# Altium PCB PCB1.PcbDoc
Units mm, origin at the board's own origin, x right, y up, seen from the top; angles counter-clockwise.
Board outline 67 x 97.84 mm, 4 copper layers (Top Layer, +5V, GND, Bottom Layer), stack 0.778 mm thick; 87 components, 66 nets, 324 pads, 26 vias.
Unrouted connection lines stored in the file: 44.
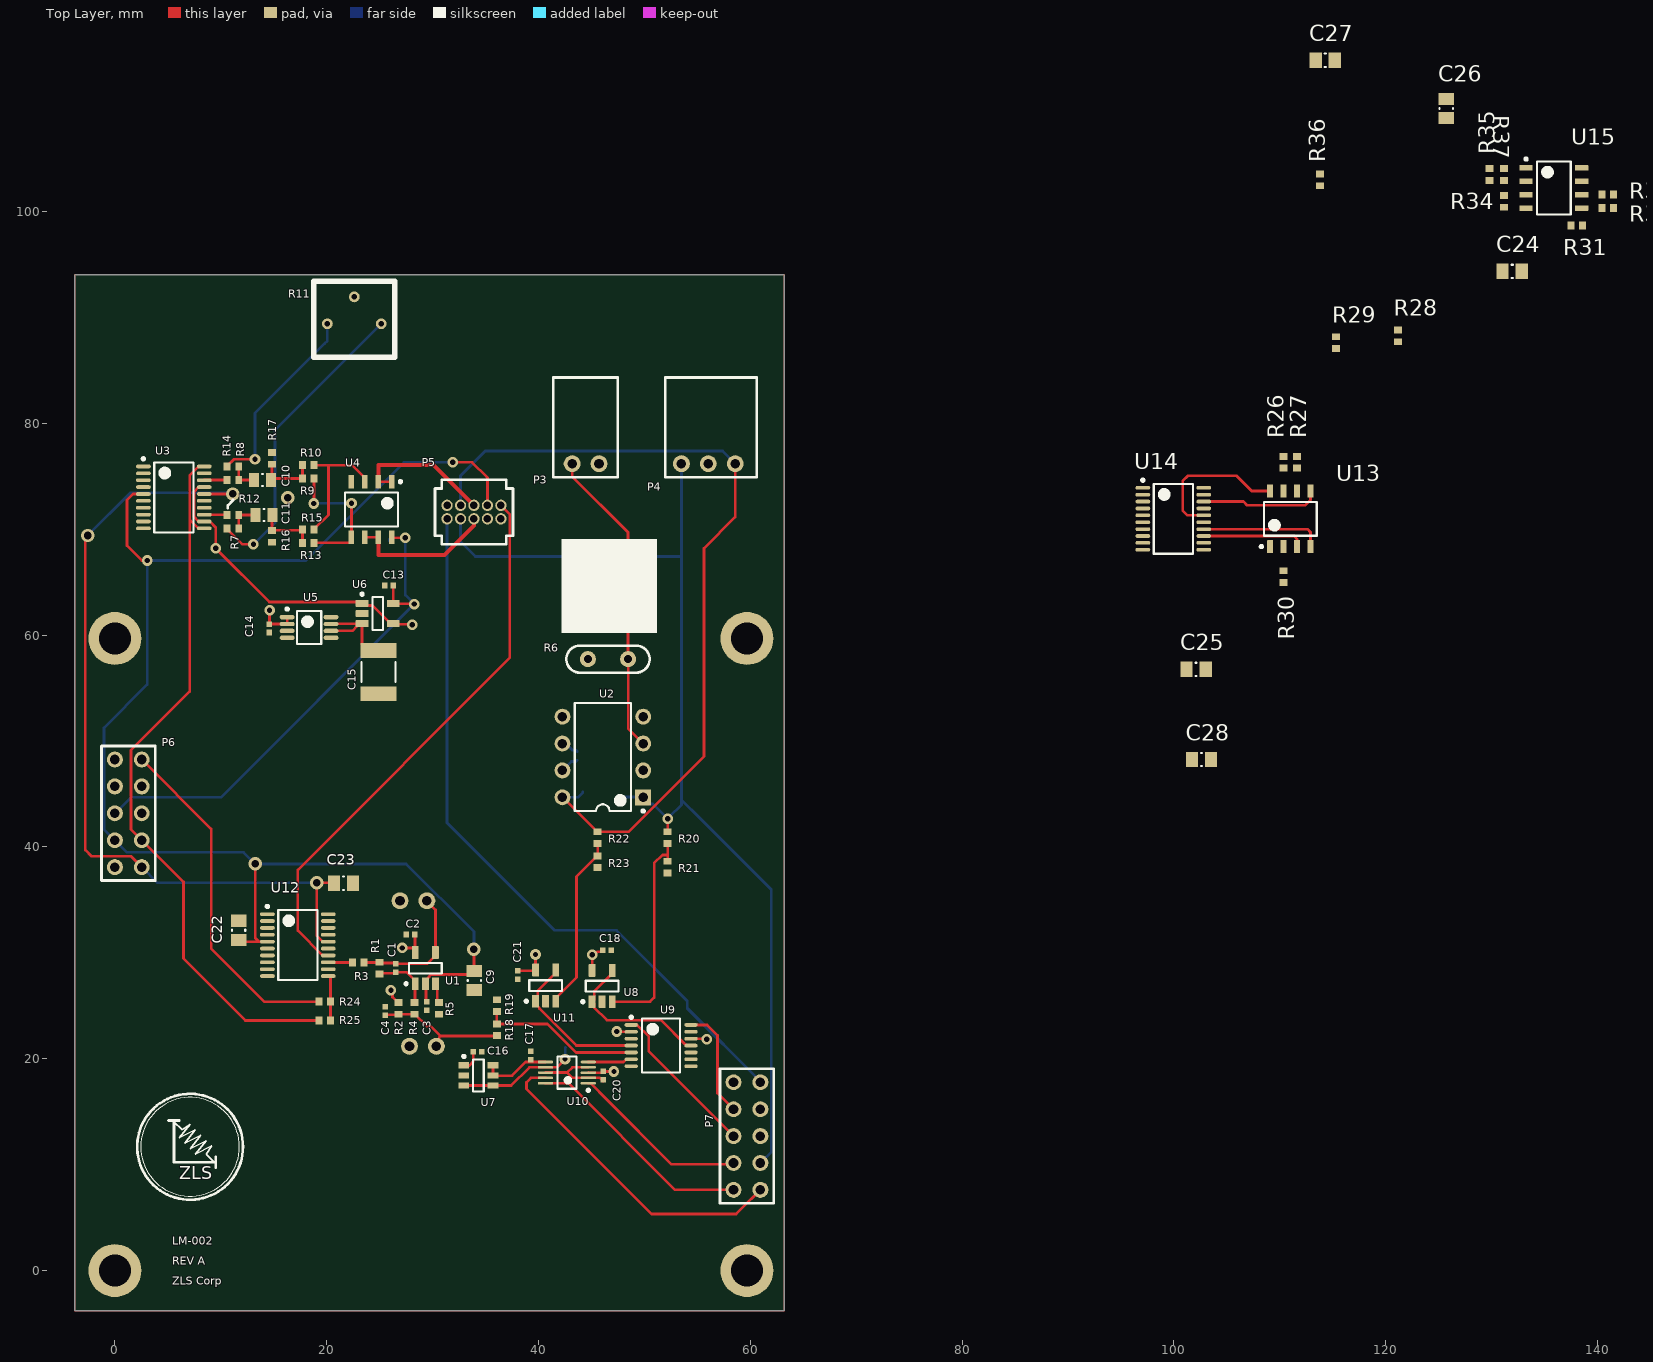
[diagram p0: Top Layer view]
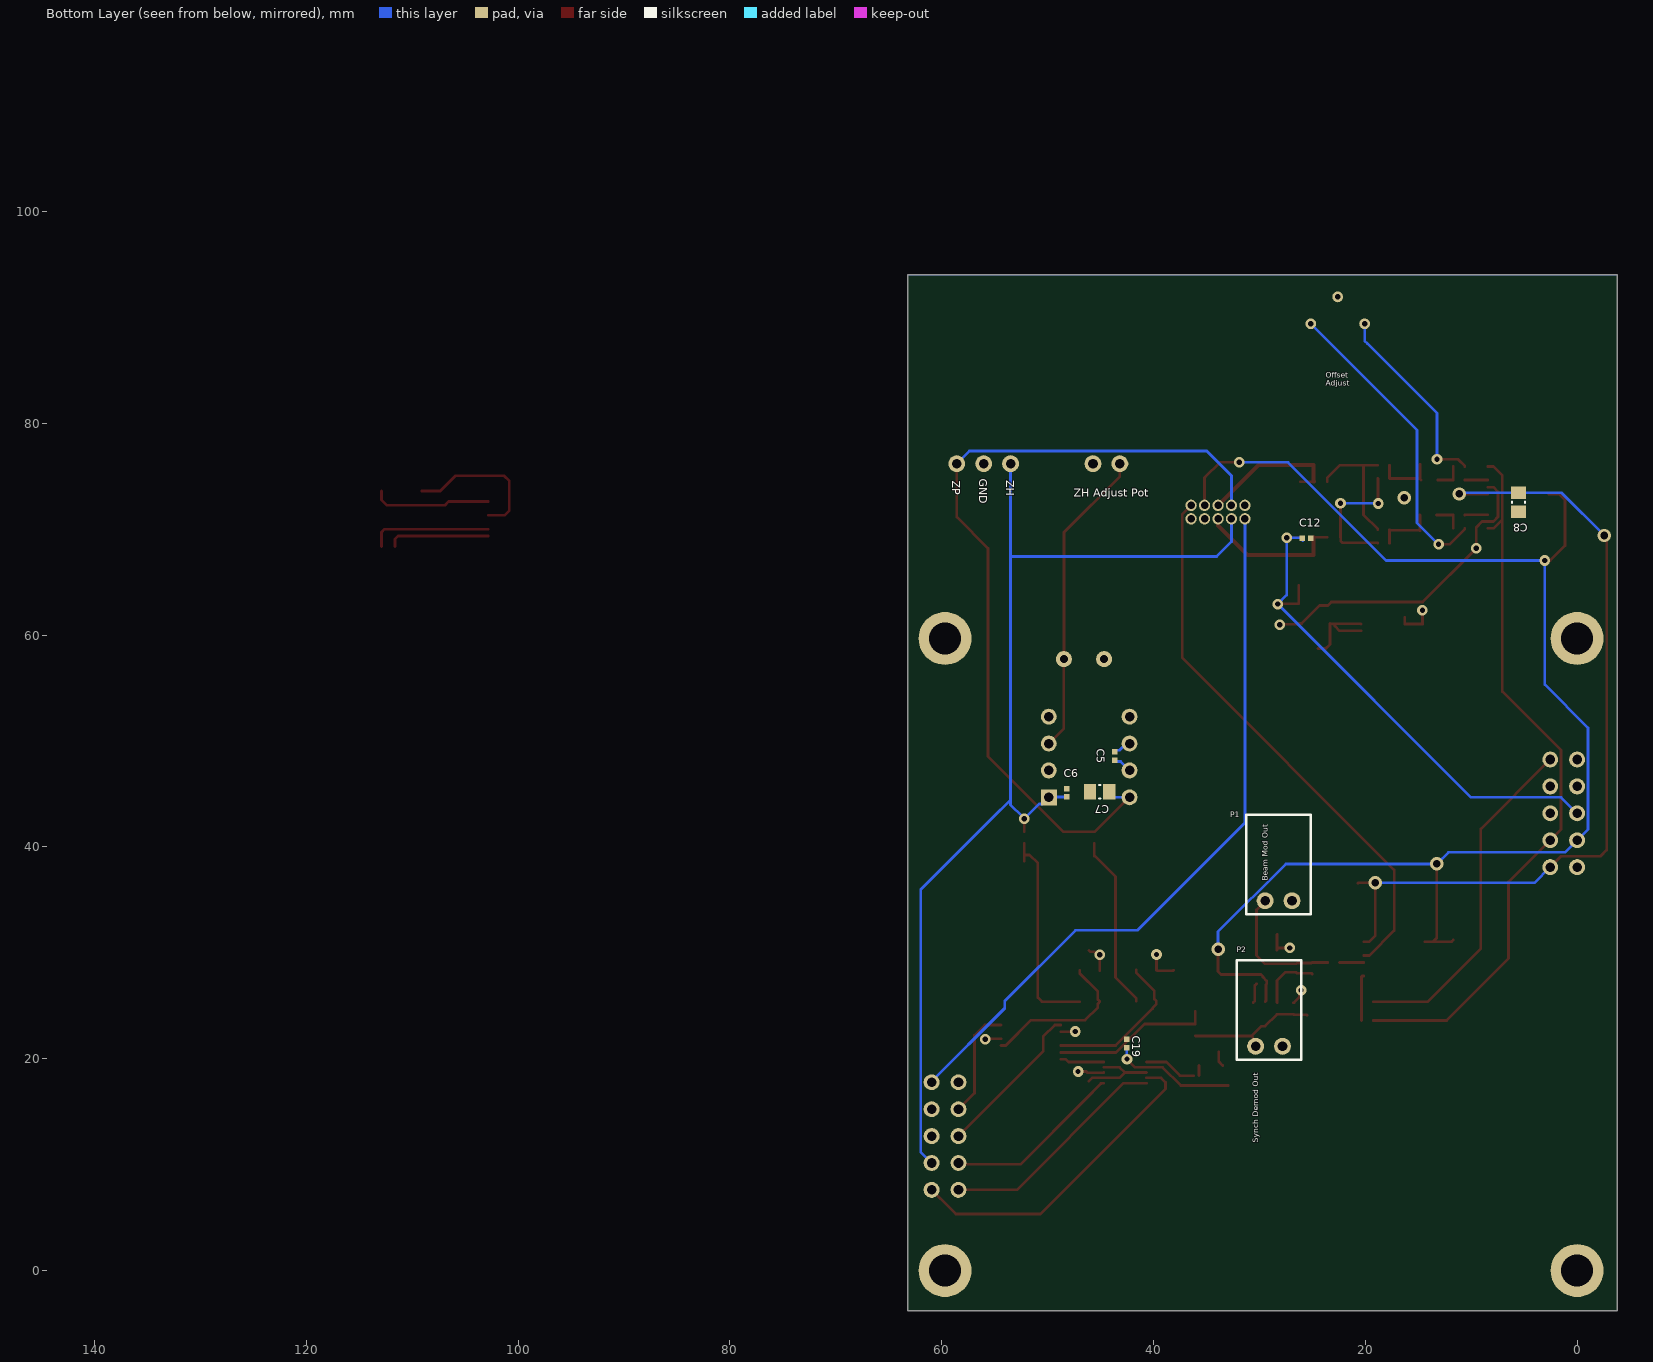
[diagram p1: Bottom Layer view, seen from below]
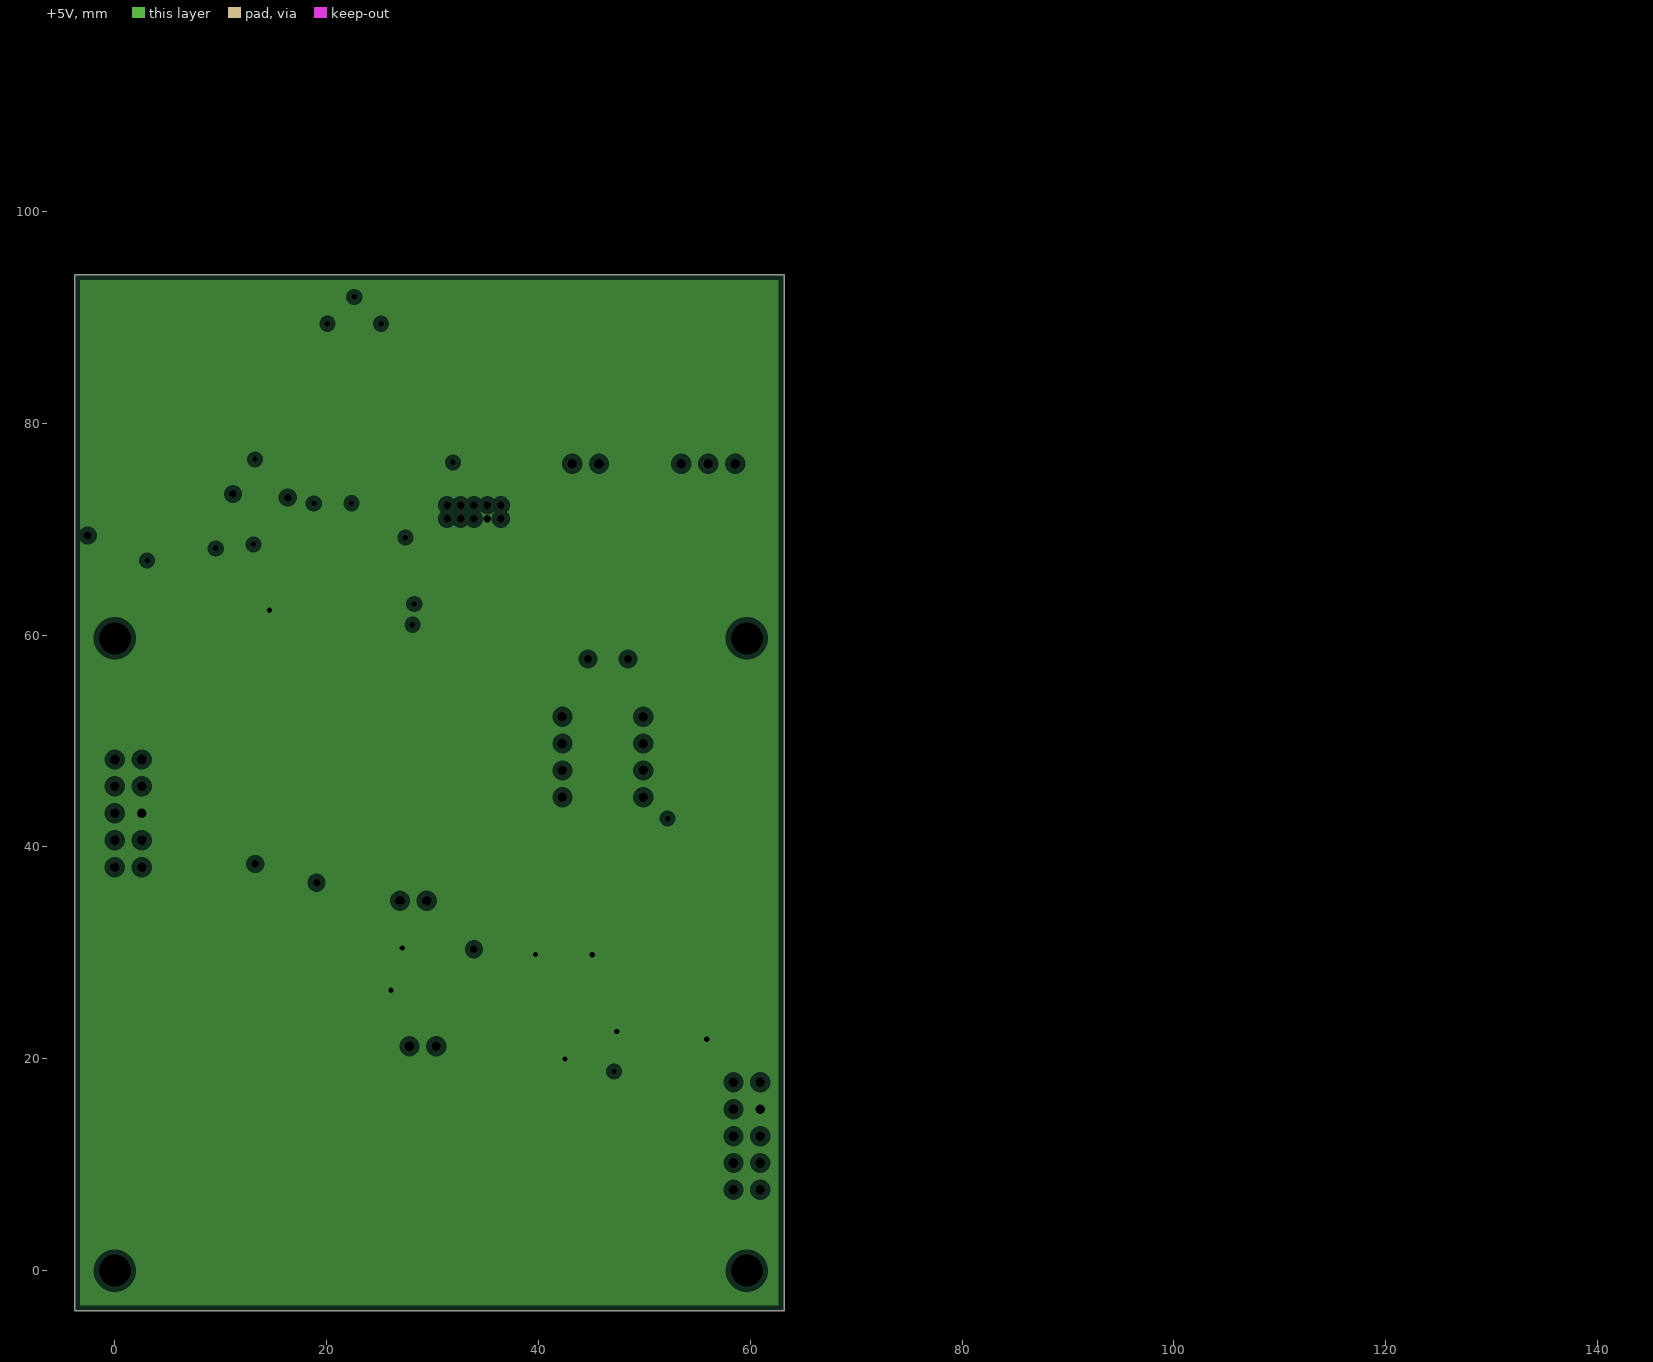
[diagram p2: +5V, clearances drawn from the general rule]
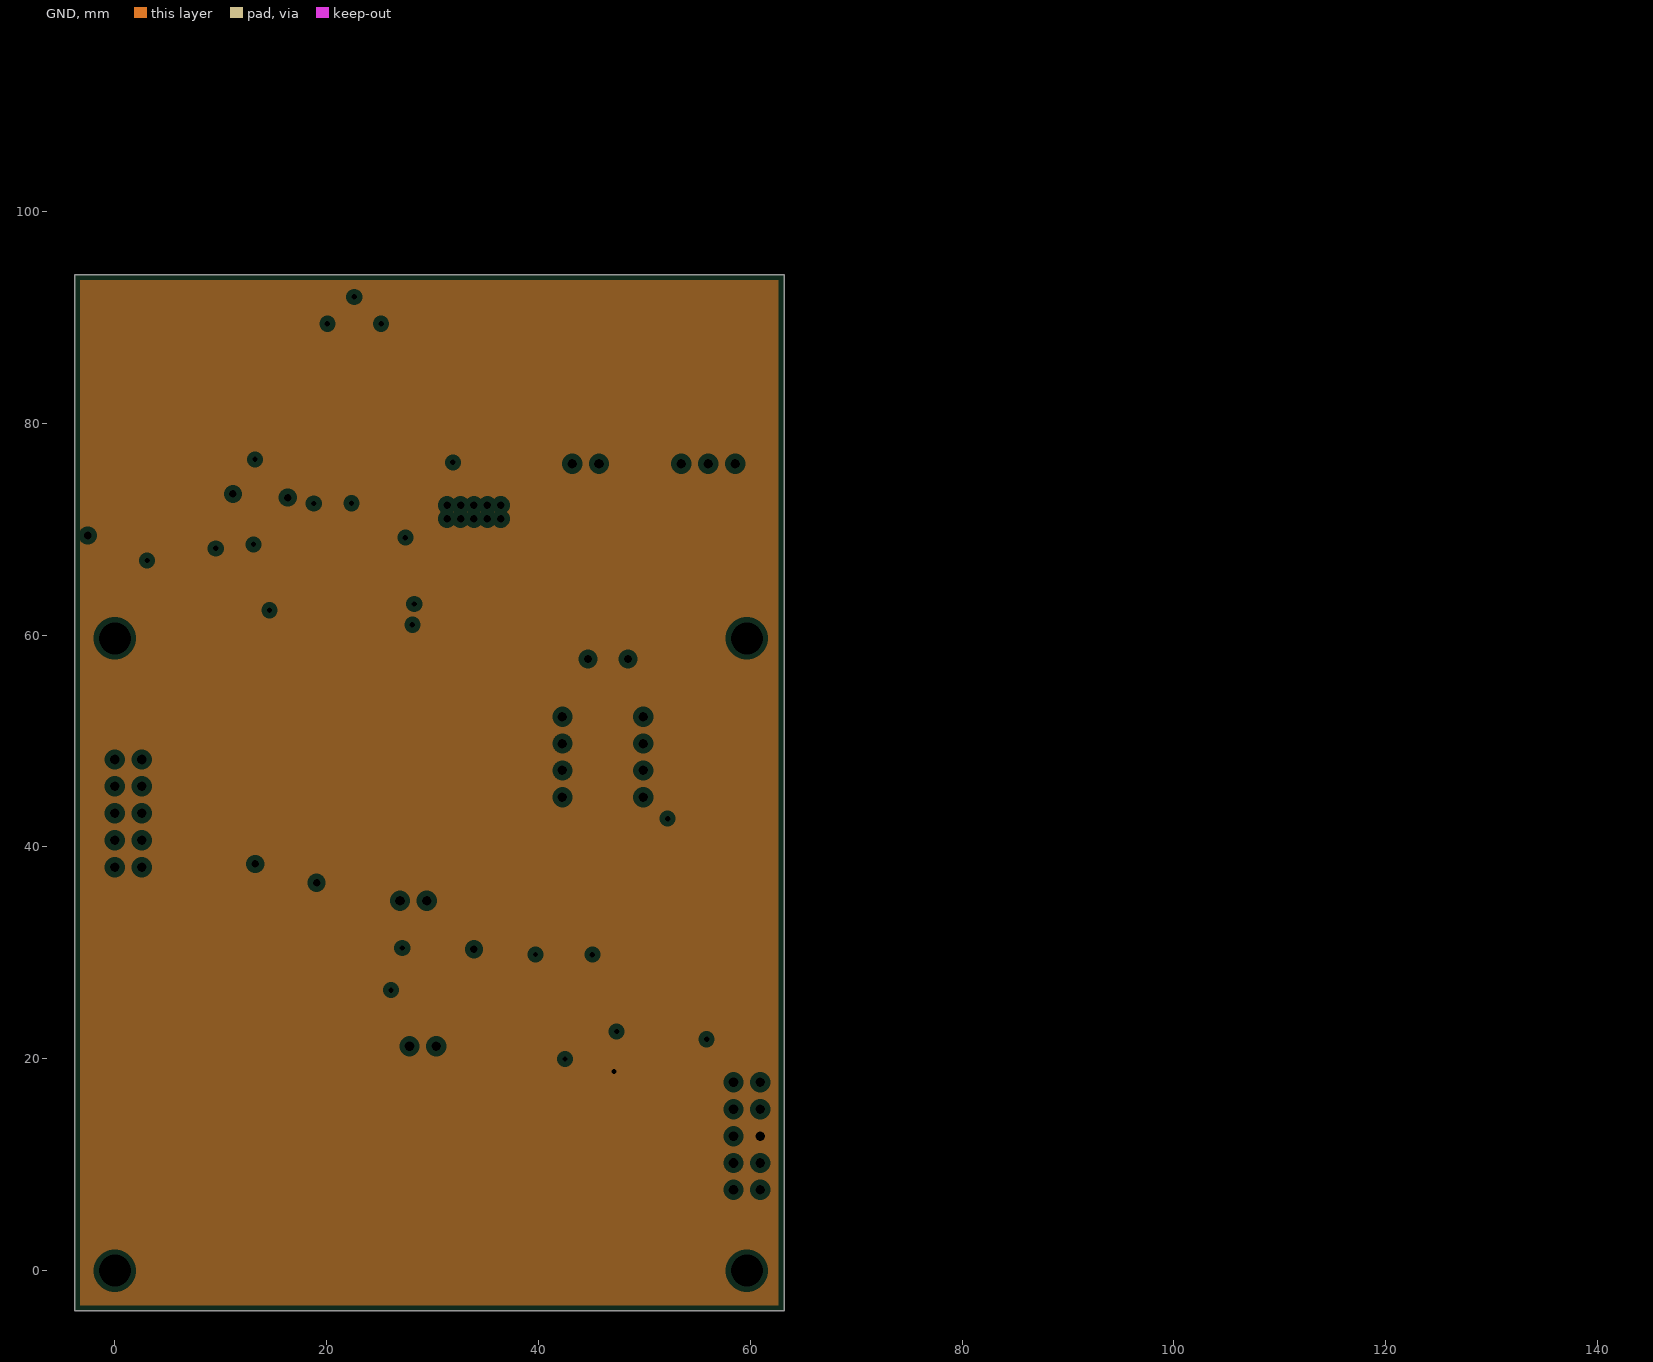
[diagram p3: GND, clearances drawn from the general rule]

## Layer stack, top to bottom
Top Solder: solder mask 0.0102, Solder Resist, Dk 3.5
Top Layer: signal copper 0.0356
Dielectric 1: core 0.254, FR-4, Dk 4.2
+5V: plane copper 0.036, net +5
Dielectric 4: prepreg 0.127, Dk 4.2
GND: plane copper 0.036, net +3.3
Dielectric 3: core 0.254, Dk 4.2
Bottom Layer: signal copper 0.0356
Bottom Solder: solder mask 0.0102, Solder Resist, Dk 3.5

## Board outline
-3.813,-3.813 63.187,-3.813 63.187,94.031 -3.813,94.031

## Design rules (kind name [scope] priority, off if disabled: settings)
Clearance [All] p1: gap=0.15 ignorepadtopadclearanceinfootprint=TRUE except(0.04: SMDPad-SMDPad; 0.1: SMDPad-THPad)
DiffPairsRouting DiffPair_DiffPairsRouting [InDifferentialPair ('PLATE')] p1: maxlimit=0.254 minlimit=0.254 mostfreqgap=0.254 toplayer_minwidth=0.381 toplayer_maxwidth=0.381 toplayer_prefwidth=0.381 bottomlayer_minwidth=0.381 bottomlayer_maxwidth=0.381 bottomlayer_prefwidth=0.381 maxuncoupledlength=12.7
DiffPairsRouting [All] p2: maxlimit=0.254 minlimit=0.254 mostfreqgap=0.254 toplayer_minwidth=0.381 toplayer_maxwidth=0.381 toplayer_prefwidth=0.381 bottomlayer_minwidth=0.381 bottomlayer_maxwidth=0.381 bottomlayer_prefwidth=0.381 maxuncoupledlength=12.7
HoleSize [All] p1: absolutevalues=TRUE maxlimit=10 minlimit=0.076 maxpercent=80.000 minpercent=20.000
HoleToHoleClearance [All] p1: gap=0.12 allowstackedmicrovias=TRUE
MatchedLengths DiffPair_MatchedLengths [InDifferentialPair ('PLATE')] p1: tolerance=2.54 checknetsindiffpair=FALSE checkdiffpairvsdiffpair=TRUE checkxsignals=TRUE checkothers=TRUE
MinimumSolderMaskSliver [All] p1: minsoldermaskwidth=0.025
PlaneClearance [All] p1: clearance=0.508
PlaneConnect [All] p1: planeconnectstyle=Relief reliefexpansion=0.508 reliefentries=4 reliefconductorwidth=0.254 reliefairgap=0.254
PolygonConnect [All] p1: connectstyle=Relief reliefconductorwidth=0.254 reliefentries=4 polygonreliefangle="90 Angle" airgapwidth=0.254
RoutingVias [All] p1: holewidth=0.711 width=1.27 viastyle="Through Hole" minholewidth=0.127 minwidth=0.9 maxholewidth=1.4 maxwidth=2.54
SilkToSilkClearance [All] p1: silktosilkclearance=0.12
SilkToSolderMaskClearance [IsPad] p1: minsilkscreentomaskgap=0.12 clearancetoexposedcopper=TRUE
SolderMaskExpansion [All] p1: expansion=0.102
Width [All] p1: maxlimit=0.254 minlimit=0.1 preferedwidth=0.254
22 further rules are at their usual default settings.

## Classes and differential pairs
component class Sheet4: C26 C27 C28 R31 R32 R33 R34 R35 R36 R37 U15
component class Sheet3: C24 C25 R26 R27 R28 R29 R30 U13 U14
component class Sheet2: C16 C17 C18 C19 C20 C21 R18 R19 R20 R21 R22 R23 U7 U8 U9 U10 U11
component class Sheet1: 19.685mil C1 C2 C3 C4 C5 C6 C7 C8 C9 C10 C11 C12 C13 C14 C15 C22 C23 P1 P2 P3 P4 P5 P6 P7 R1 R2 R3 R4 R5 R6 R7 R8 R9 R10 R11 R12 R13 R14 R15 R16 R17 R24 R25 U1 U2 U3 U4 U5 U6 U12
differential pair PLATE: +PLATE_P -PLATE_N

## Components (designator, comment, footprint, x,y, rotation, side; value= is the part's Value field where it differs from the comment)
C1 "" CAPC0402(1005)60_L 26.525,28.561 r270 top
C2 "0.1uF" CAPC0402(1005)60_L 27.922,31.736 r180 top
C3 "0.1uF" CAPC0402(1005)60_L 29.446,25.005 r270 top
C4 "" CAPC0402(1005)60_L 25.509,24.497 r270 top
C5 "0.1uF" CAPC0402(1005)60_L 43.663,48.602 r90 bottom
C6 "0.1uF" CAPC0402(1005)60_L 48.21,45.122 r270 bottom
C7 "Multilayer Ceramic Capacitors MLCC - SMD/SMT 0.01uF 50volts 10% X7R" CAPC0805(2012)145_N 45.085,45.212 r0 bottom
C8 "CAP CER 0.1UF 25V X7R 0805" CAPC0805(2012)145_N 5.538,72.554 r90 bottom
C9 "CAP CER 0.1UF 25V X7R 0805" CAPC0805(2012)145_N 33.941,27.393 r270 top
C10 "CAP CER 1UF 25V X7R 0805" CAPC0805(2012)155_L 13.945,74.662 r180 top
C11 "CAP CER 1UF 25V X7R 0805" CAPC0805(2012)155_L 14.072,71.36 r180 top
C12 "0.1uF" CAPC0402(1005)60_L 25.553,69.176 r0 bottom
C13 "0.1uF" CAPC0402(1005)60_L 25.883,64.694 r0 top
C14 "0.1uF" CAPC0402(1005)60_L 14.58,60.655 r90 top
C15 "CAP FILM 10UF 20% 16VDC 1812" CAPC1812(4532)250_N 24.892,56.515 r90 top value=10uF
C16 "0.1uF" CAPC0402(1005)60_L 34.242,20.642 r0 top
C17 "0.1uF" CAPC0402(1005)60_L 39.249,20.32 r270 top
C18 "0.1uF" CAPC0402(1005)60_L 46.488,30.226 r180 top
C19 "0.1uF" CAPC0402(1005)60_L 42.551,21.463 r90 bottom
C20 "0.1uF" CAPC0402(1005)60_L 46.107,18.415 r270 top
C21 "0.1uF" CAPC0402(1005)60_L 38.031,27.901 r90 top
C22 "CAP CER 0.1UF 25V X7R 0805" CAPC0805(2012)145_N 11.684,32.131 r90 top
C23 "CAP CER 0.1UF 25V X7R 0805" CAPC0805(2012)145_N 21.59,36.576 r180 top
C24 "CAP CER 0.1UF 25V X7R 0805" CAPC0805(2012)145_N 131.95,94.358 r0 top
C25 "CAP CER 0.1UF 25V X7R 0805" CAPC0805(2012)145_N 102.108,56.769 r0 top
C26 "CAP CER 0.1UF 25V X7R 0805" CAPC0805(2012)145_N 125.73,109.728 r270 top
C27 "CAP CER 0.1UF 25V X7R 0805" CAPC0805(2012)145_N 114.3,114.3 r0 top
C28 "CAP CER 0.1UF 25V X7R 0805" CAPC0805(2012)145_N 102.616,48.26 r0 top
P1 "SSW-102-02-G-S-RA" SSW-102-02-G-S-RA 26.924,34.925 r0 bottom
P2 "SSW-102-02-G-S-RA" SSW-102-02-G-S-RA 27.819,21.179 r0 bottom
P3 "SSW-102-02-G-S-RA" SSW-102-02-G-S-RA 45.72,76.2 r180 top
P4 "SSW-103-02-G-S-RA" SSW-103-02-G-S-RA 53.5,76.2 r0 top
P5 "FTSH-105-01-F-DV-K" FTSH-105-01-XXX-D-K 33.909,71.628 r180 top
P6 "TLW-105-05-G-D" TLW-105-05-G-D 0,48.26 r270 top
P7 "TLW-105-05-G-D" TLW-105-05-G-D 58.42,17.78 r270 top
R1 "300K" RESC0402(1005)_M 25.001,28.561 r270 top
R2 "100k" RESC0402(1005)_M 26.779,24.751 r90 top
R3 "18K2 1% 0402(1005)" RESC0402(1005)_M 22.987,29.083 r0 top
R4 "511k" RESC0402(1005)_M 28.303,24.751 r270 top
R5 "33K" RESC0402(1005)_M 30.589,24.751 r90 top
R6 "TBD" VH102K 48.469,57.738 r180 top
R7 "3.9k" RESC0402(1005)_M 11.151,74.662 r180 top
R8 "7.5k" RESC0402(1005)_M 11.151,75.932 r0 top
R9 "0" RESC0402(1005)_M 18.263,74.789 r180 top
R10 "DNP" RESC0402(1005)_M 18.263,76.059 r180 top
R11 "TRIMMER 5K OHM 0.25W PC PIN" "TRIMMER 2.54" 20.066,89.408 r0 top
R12 "7.5k" RESC0402(1005)_M 11.151,70.09 r180 top
R13 "DNP" RESC0402(1005)_M 18.263,68.693 r180 top
R14 "3.9k" RESC0402(1005)_M 11.151,71.36 r0 top
R15 "0" RESC0402(1005)_M 18.263,69.963 r180 top
R16 "1M" RESC0402(1005)_M 14.834,69.328 r90 top
R17 "1M" RESC0402(1005)_M 14.834,76.694 r270 top
R18 "10k" RESC0402(1005)_M 36.074,22.733 r270 top
R19 "10k" RESC0402(1005)_M 36.074,25.019 r270 top
R20 "100k" RESC0402(1005)_M 52.197,40.894 r90 top
R21 "10k" RESC0402(1005)_M 52.197,38.1 r90 top
R22 "100k" RESC0402(1005)_M 45.593,40.894 r90 top
R23 "10k" RESC0402(1005)_M 45.593,38.608 r90 top
R24 "OPEN" RESC0402(1005)_M 19.812,25.4 r0 top
R25 "0" RESC0402(1005)_M 19.812,23.622 r0 top
R26 "100k" RESC0402(1005)_M 110.363,76.327 r270 top
R27 "100k" RESC0402(1005)_M 111.633,76.327 r270 top
R28 "47k" RESC0402(1005)_M 121.158,88.265 r90 top
R29 "100k" RESC0402(1005)_M 115.316,87.63 r90 top
R30 "100k" RESC0402(1005)_M 110.363,65.532 r90 top
R31 "2.2M" RESC0402(1005)_M 138.049,98.679 r180 top
R32 "100" RESC0402(1005)_M 140.97,100.33 r0 top
R33 "100" RESC0402(1005)_M 140.97,101.6 r0 top
R34 "475K" RESC0402(1005)_M 131.191,100.965 r270 top
R35 "10k" RESC0402(1005)_M 129.794,103.505 r90 top
R36 "47.5K" RESC0402(1005)_M 113.792,102.997 r90 top
R37 "301K" RESC0402(1005)_M 131.191,103.505 r270 top
U1 "OPA188AIDBVR" DBV0005A_M 29.319,28.561 r90 top
U2 "AD584KNZ" ADI-N-8 46.076,48.5 r180 top
U3 "MAX333CWP+" TSOP65P640X90-20N 5.563,73.011 r0 top
U4 "OPA2188AIDR" D0008A_L 24.232,71.868 r270 top
U5 "LTC6655BHMS8-5#PBF" TSOP65P490X110-8N 18.339,60.731 r0 top
U6 "OPA188AIDBVR" DBV0005A_M 24.816,62.052 r0 top
U7 "MAX6070AAUT41+T" SOT95P280X445-6N 34.331,18.422 r0 top
U8 "OPA188AIDBVR" DBV0005A_M 46.017,26.87 r90 top
U9 "ADG1204YRUZ-REEL7" ADI-RU-14_L 51.581,21.247 r0 top
U10 "MAX11100EUB+T" U10+2_L 42.684,18.695 r180 top
U11 "OPA188AIDBVR" DBV0005A_M 40.678,26.91 r90 top
U12 "MAX333CWP+" TSOP65P640X90-20N 17.272,30.734 r0 top
U13 "OPA2188AIDR" D0008A_L 110.998,70.993 r90 top
U14 "MAX333CWP+" TSOP65P640X90-20N 99.949,70.993 r0 top
U15 "OPA2188AIDR" D0008A_L 135.887,102.232 r0 top

## Footprints (in the part's own frame and the unit in brackets; to place one, negate y for a bottom-side part, rotate by r counter-clockwise, add the part's x,y. Pads: shape width x height; smd on the part's side, far side on the other; paste and mask are expansions set on the pad)
ADI-N-8 [mm] "DIP, 8-Leads, Body 9.59x6.6mm, Pitch 2.54mm"
  rect 1.5x1.5 hole 0.9: 1(-3.81,3.81)
  round 1.5 hole 0.9: 2(-3.81,1.27) 3(-3.81,-1.27) 4(-3.81,-3.81) 5(3.81,-3.81) 6(3.81,-1.27) 7(3.81,1.27) 8(3.81,3.81)
  silkscreen extent -3.94,-5.1 2.65,5.23, body extent -3.95,-5.07 3.95,5.07, height 5.33
ADI-RU-14_L [mm] "SOP, 14-Leads, Body 5x4.4mm, Pitch 0.65mm, IPC High Density"
  oval 1.25x0.35 smd: 1(-2.825,1.95) 2(-2.825,1.3) 3(-2.825,0.65) 4(-2.825,0) 5(-2.825,-0.65) 6(-2.825,-1.3) 7(-2.825,-1.95) 8(2.825,-1.95) 9(2.825,-1.3) 10(2.825,-0.65) 11(2.825,0) 12(2.825,0.65) 13(2.825,1.3) 14(2.825,1.95)
  silkscreen extent -2.95,-2.55 1.8,2.8, body extent -2.25,-2.55 2.25,2.55, height 1.2
CAPC0402(1005)60_L [mm] "Chip Capacitor, Body 1.0x0.5mm, Height 0.6mm, IPC High Density"
  rect 0.52x0.52 smd: 1(-0.4,0) 2(0.4,0)
  body extent -0.55,-0.3 0.55,0.3, height 0.6
CAPC0805(2012)145_N [mm] "Chip Capacitor, Body 2.0x1.2mm, Height 1.45mm, IPC Medium Density"
  rect 1.15x1.45 smd: 1(-0.9,0) 2(0.9,0)
  silkscreen extent -0.05,-0.62 0.05,0.62, body extent -1.1,-0.72 1.1,0.73, height 1.45
CAPC0805(2012)155_L [mm] "Chip Capacitor, Body 2.0x1.2mm, Height 1.55mm, IPC High Density"
  rect 0.95x1.35 smd: 1(-0.8,0) 2(0.8,0)
  silkscreen extent -0.05,-0.57 0.05,0.57, body extent -1.1,-0.72 1.1,0.72, height 1.55
CAPC1812(4532)250_N [mm] "Chip Capacitor, Body 4.5x3.2mm, Height 2.5mm, IPC Medium Density"
  rect 1.4x3.4 smd: 1(-2.05,0) 2(2.05,0)
  silkscreen extent -0.95,-1.6 0.95,1.6, body extent -2.4,-1.7 2.4,1.7, height 2.5
D0008A_L [mm] "SOIC, 8-Leads, Body 5x4mm, Pitch 1.27mm, IPC High Density"
  rrect18% 1.25x0.55 smd: 1(-2.625,1.905) 2(-2.625,0.635) 3(-2.625,-0.635) 4(-2.625,-1.905) 5(2.625,-1.905) 6(2.625,-0.635) 7(2.625,0.635) 8(2.625,1.905)
  silkscreen extent -2.75,-2.5 1.6,2.86, body extent -3,-2.45 3,2.45, height 1.63
DBV0005A_M [mm] "SOT23, 5-Leads, Body 3.05x1.75mm, Pitch 0.95mm, IPC Low Density"
  rrect15% 1.2x0.65 smd: 1(-1.475,0.95) 2(-1.475,0) 3(-1.475,-0.95) 4(1.475,-0.95) 5(1.475,0.95)
  silkscreen extent -1.6,-1.55 0.5,1.95, body extent -1.42,-1.46 1.42,1.46, height 1.08
FTSH-105-01-XXX-D-K [mil]
  round 42 hole 28 mask+3: 1(-100,-25) 2(-100,25) 3(-50,-25) 4(-50,25) 5(0,-25) 6(0,25) 7(50,-25) 8(50,25) 9(100,-25) 10(100,25)
  silkscreen extent -145,-120 145,120
RESC0402(1005)_M [mm] "Chip Resistor, Body 1.0x0.5mm, IPC Low Density"
  rect 0.65x0.75 smd: 1(-0.55,0) 2(0.55,0)
  body extent -0.52,-0.28 0.53,0.28, height 0.4
SOT95P280X445-6N [mm] "SOT23, 6-Leads, Body 2.90x2.80mm, Pitch 0.95mm, IPC Medium Density"
  rect 1x0.6 smd: 1(-1.375,0.95) 2(-1.375,0) 3(-1.375,-0.95) 4(1.375,-0.95) 5(1.375,0) 6(1.375,0.95)
  silkscreen extent -1.5,-1.5 0.5,1.92, body extent -1.5,-1.5 1.5,1.5, height 4.45
SSW-102-02-G-S-RA [mm]
  round 1.6 hole 0.91: 1(0,0) 2(2.54,0)
  silkscreen extent -1.78,-8.13 4.32,1.27, body extent -1.52,-8.06 4.06,0.44, height 3.21
SSW-103-02-G-S-RA [mm]
  round 1.6 hole 0.91: 1(0,0) 2(2.54,0) 3(5.08,0)
  silkscreen extent -1.52,-1.27 7.11,8.13, body extent -1.27,-0.44 6.86,8.06, height 1.73
TLW-105-05-G-D [mm]
  round 1.5 hole 0.91: 1(0,0) 2(0,2.54) 3(2.54,0) 4(2.54,2.54) 5(5.08,0) 6(5.08,2.54) 7(7.62,0) 8(7.62,2.54) 9(10.16,0) 10(10.16,2.54)
  silkscreen extent -1.27,-1.27 11.43,3.81, body extent -1.27,-1.31 11.43,3.72, height 6.35
"TRIMMER 2.54" [mil]
  round 40 hole 20: 1(0,0) 2(100,100) 3(200,0)
  silkscreen extent -50,-125 250,158, body extent -60,-126 260,200, height 175
TSOP65P490X110-8N [mm] "TSOP, 8-Leads, Body 3.00x3.00mm, Pitch 0.65mm, IPC Medium Density"
  oval 1.4x0.42 smd: 1(-2.075,0.975) 2(-2.075,0.325) 3(-2.075,-0.325) 4(-2.075,-0.975) 5(2.075,-0.975) 6(2.075,-0.325) 7(2.075,0.325) 8(2.075,0.975)
  silkscreen extent -2.2,-1.55 1.15,1.86, body extent -2.46,-1.55 2.46,1.55, height 1.1
TSOP65P640X90-20N [mm] "TSOP, 20-Leads, Body 6.50x4.40mm, Pitch 0.65mm, IPC Medium Density"
  oval 1.4x0.35 smd: 1(-2.875,2.925) 2(-2.875,2.275) 3(-2.875,1.625) 4(-2.875,0.975) 5(-2.875,0.325) 6(-2.875,-0.325) 7(-2.875,-0.975) 8(-2.875,-1.625) 9(-2.875,-2.275) 10(-2.875,-2.925) 11(2.875,-2.925) 12(2.875,-2.275) 13(2.875,-1.625) 14(2.875,-0.975) 15(2.875,-0.325) 16(2.875,0.325) 17(2.875,0.975) 18(2.875,1.625) 19(2.875,2.275) 20(2.875,2.925)
  silkscreen extent -3,-3.3 1.85,3.77, body extent -2.25,-3.3 2.25,3.3, height 0.9
U10+2_L [mm] "TSSOP, 10-Leads, Body 3x3mm, Pitch 0.5mm, IPC High Density"
  oval 1.45x0.25 smd: 1(-2.025,1) 2(-2.025,0.5) 3(-2.025,0) 4(-2.025,-0.5) 5(-2.025,-1) 6(2.025,-1) 7(2.025,-0.5) 8(2.025,0) 9(2.025,0.5) 10(2.025,1)
  silkscreen extent -2.15,-1.53 0.9,1.8, body extent -1.55,-1.55 1.55,1.55, height 1.1
VH102K [mil] "Hermetically Sealed High Precision Resistor"
  round 60 hole 30: 1(0,0) 2(149.61,0)
  silkscreen extent -80,-50 230,50

## Part data
C1: library part CMP-1034-01343-1, Capacitance=470nF, Case/Package=0402, Case Code (Metric)=1005, Dielectric=X5R, Dielectric Material=Ceramic, Manufacturer=TDK, Manufacturer Part Number=C1005X5R1E474M050BB, Max Operating Temperature=85°C, Min Operating Temperature=-55°C, Package Quantity=10000, Supplier Part Number 1=810-C1005X5R1E474M, Tolerance=20%, Voltage Rating=25V, Case Code (Imperial)=0402, ComponentLink1Description=https://datasheet.ciiva.com/26870/getdatasheetpartid-753870-26870164.pdf, ComponentLink1URL=https://datasheet.ciiva.com/26870/getdatasheetpartid-753870-26870164.pdf, ComponentLink2Description=https://datasheet.ciiva.com/24219/mlcc-commercial-general-en-24219290.pdf, ComponentLink2URL=https://datasheet.ciiva.com/24219/mlcc-commercial-general-en-24219290.pdf, Composition=Ceramic, Depth=0.5mm, Height=0.5mm, Lead Free="Lead Free", Length=1mm, Mount="Surface Mount", Packaging="Tape and Reel", Pricing 1="1=0.15, 10=0.101, 50=0.101, 100=0.04, 1000=0.028, 10000=0.023 (USD)", Radiation Hardening=No, REACH SVHC="No SVHC", Stock 1=40105, Supplier 1=Mouser, Termination=SMD/SMT, Thickness=500um, Voltage Rating (DC)=25V, Weight=2.3E-05oz, Width=0.02inch
C2 C3 C5 C6 C12 C13 C14 C16 C17 C18 C19 C20 C21: library part CMP-1034-00252-1, "CAP CER 0.1UF 10V X7R 0402", Manufacturer="Murata Electronics North America", Manufacturer Part Number=GRM155R71A104KA01D, Operating Temperature="-55°C ~ 125°C", Package / Case="0402 (1005 Metric)", Ratings=-, Supplier Part Number 1=490-6321-1-ND, Temperature Coefficient=X7R, Tolerance=±10%, Voltage - Rated=10V, Applications="General Purpose", Category=Capacitors, ComponentLink1Description=http://www.murata.com/~/media/webrenewal/support/library/catalog/products/capacitor/mlcc/c02e.ashx?la=en-us, ComponentLink1URL=http://www.murata.com/~/media/webrenewal/support/library/catalog/products/capacitor/mlcc/c02e.ashx?la=en-us, Features=-, Height - Seated (Max)=-, Lead Spacing=-, Mounting Type="Surface Mount, MLCC", Packaging="Cut Tape (CT)", Part Status=Active, Pricing 1="1=0.1, 10=0.014, 100=0.0063, 500=0.00446, 1000=0.00351, 2500=0.00319, 5000=0.00293 (USD)", RoHS="RoHS Compliant", Size / Dimension="0.039\" L x 0.020\" W (1.00mm x 0.50mm)", Stock 1=2920395, Supplier 1=Digi-Key, Thickness (Max)="0.022\" (0.55mm)"
C4: library part CMP-1034-01343-1, Capacitance=22, Capacitance Tolerance=5%, Ceramic Capacitor Case="0402 [1005 Metric]", Dielectric Characteristic="C0G / NP0", Manufacturer=AVX, Manufacturer Part Number=04025A220JAT2A, Supplier Part Number 1=96M1143, Voltage Rating=50, ComponentLink1Description=http://www.farnell.com/datasheets/2068140.pdf, ComponentLink1URL=http://www.farnell.com/datasheets/2068140.pdf, Packaging="Cut Tape", Pricing 1="1=0.003, 25=0.003, 100=0.003, 250=0.003, 500=0.003, 1000=0.003, 2500=0.003 (USD)", Product Range=-, RoHS=YES, Stock 1=239391, Supplier 1=Newark
C7: library part CMP-1036-04795-1, Capacitance=10nF, Case/Package=0805, Case Code (Metric)=2012, Dielectric=X7R, Dielectric Material=Ceramic, Manufacturer=Kemet, Manufacturer Part Number=C0805C103K5RACAUTO, Max Operating Temperature=125°C, Min Operating Temperature=-55°C, Package Quantity=1, Supplier Part Number 1=399-6924-1-ND, Tolerance=10%, Voltage Rating=50V, Case Code (Imperial)=0805, ComponentLink1Description=https://datasheet.ciiva.com/22700/1693454-22700519.pdf, ComponentLink1URL=https://datasheet.ciiva.com/22700/1693454-22700519.pdf, ComponentLink2Description=https://datasheet.ciiva.com/7842/1693454-7842175.pdf, ComponentLink2URL=https://datasheet.ciiva.com/7842/1693454-7842175.pdf, Contact Plating=Tin, Depth=1.25mm, Height=0.78mm, Length=2mm, Mount="Surface Mount", Packaging="Tape and Reel", Pricing 1="1=0.12, 10=0.087, 100=0.041, 500=0.0287, 1000=0.0238 (USD)", Radiation Hardening=No, REACH SVHC="No SVHC", Stock 1=63236, Supplier 1=Digi-Key, Termination=SMD/SMT, Thickness=0.035inch, Voltage Rating (DC)=50V, Width=0.049inch
C8 C9 C22 C23 C24 C25 C26 C27 C28: library part CMP-1036-04795-1, Capacitance=0.1µF, Manufacturer="Murata Electronics North America", Manufacturer Part Number=GRM21BR71E104KA01L, Operating Temperature="-55°C ~ 125°C", Package / Case="0805 (2012 Metric)", Ratings=-, Supplier Part Number 1=490-1673-6-ND, Temperature Coefficient=X7R, Tolerance=±10%, Voltage - Rated=25V, Applications="General Purpose", Category=Capacitors, ComponentLink1Description=http://www.murata.com/~/media/webrenewal/support/library/catalog/products/capacitor/mlcc/c02e.ashx, ComponentLink1URL=http://www.murata.com/~/media/webrenewal/support/library/catalog/products/capacitor/mlcc/c02e.ashx, Features=-, Height - Seated (Max)=-, Lead Spacing=-, Lead Style=-, Mounting Type="Surface Mount, MLCC", Packaging=Digi-Reel®, Part Status=Active, Pricing 1="1=0.2, 10=0.145, 100=0.0683, 500=0.04788, 1000=0.03964 (USD)", RoHS="RoHS Compliant", Size / Dimension="0.079\" L x 0.049\" W (2.00mm x 1.25mm)", Stock 1=891652, Supplier 1=Digi-Key, Thickness (Max)="0.053\" (1.35mm)"
C10 C11: library part CMP-1036-04882-1, Capacitance=1µF, Manufacturer="Murata Electronics North America", Manufacturer Part Number=GRM21BR71E105KA99L, Operating Temperature="-55°C ~ 125°C", Package / Case="0805 (2012 Metric)", Ratings=-, Supplier Part Number 1=490-6484-6-ND, Temperature Coefficient=X7R, Tolerance=±10%, Voltage - Rated=25V, Applications="General Purpose", Category=Capacitors, ComponentLink1Description=http://www.murata.com/~/media/webrenewal/support/library/catalog/products/capacitor/mlcc/c02e.ashx, ComponentLink1URL=http://www.murata.com/~/media/webrenewal/support/library/catalog/products/capacitor/mlcc/c02e.ashx, Features=-, Height - Seated (Max)=-, Lead Spacing=-, Lead Style=-, Mounting Type="Surface Mount, MLCC", Packaging=Digi-Reel®, Part Status=Active, Pricing 1="1=0.14, 10=0.099, 100=0.0468, 500=0.0328, 1000=0.02715 (USD)", RoHS="RoHS Compliant", Size / Dimension="0.079\" L x 0.049\" W (2.00mm x 1.25mm)", Stock 1=295074, Supplier 1=Digi-Key, Thickness (Max)="0.053\" (1.35mm)"
C15: library part CMP-1040-01653-1, Case-EIA=1812, Case-Metric=4532, Dielectric Material="Acrylic, Metallized", Manufacturer=Rubycon, Manufacturer Part Number=16ST106MC44532, Operating Temperature="-55°C ~ 125°C", Package / Case="1812 (4532 Metric)", Rated Voltage="16 V", Supplier Part Number 1=1189-1792-1-ND, Tolerance=±10%, Voltage Rating - AC=-, Voltage Rating - DC=16V, Applications="DC Link, DC Filtering", Category=Capacitors, ComponentLink1Description=http://www.rubycon.co.jp/en/catalog/e_pdfs/pmlcap/e_ST.pdf, ComponentLink1URL=http://www.rubycon.co.jp/en/catalog/e_pdfs/pmlcap/e_ST.pdf, Features=-, Height - Seated (Max)="0.102\" (2.60mm)", Lead Spacing=-, Max Thickness="2.5 mm", Mounting Type="Surface Mount", Packaging="Cut Tape (CT)", Part Status=Active, Pricing 1="1=7.05, 10=6.263, 100=5.0105 (USD)", RoHS="RoHS Compliant", Size / Dimension="0.177\" L x 0.126\" W (4.50mm x 3.20mm)", Stock 1=1994, Supplier 1=Digi-Key, Technology=SMT
P1 P2 P3: Supplier Part Number 1=SAM1225-02-ND, Supplier 1=Digi-Key
P5: library part FTSH-105-01-XXX-D-K, "TERMINAL STRIP, .050\"(1.27mm) PITCH, 10 PINS, KEYING OPTION.", Manufacturer=SAMTEC, CREATED="September 26, 2016 - Wendy Xin", PCB DECAL=FTSH-105-01-F-DV-K
P6 P7: Current Rating="5.2A per Contact", Insulation Color=Black, Manufacturer="Samtec Inc.", Manufacturer Part Number=MTLW-105-05-G-D-170, Material Flammability Rating="UL94 V-0", Operating Temperature="-55°C ~ 125°C", Supplier Part Number 1=MTLW-105-05-G-D-170-ND, Voltage Rating=-, Applications=-, Category="Connectors, Interconnects", ComponentLink1Description=http://suddendocs.samtec.com/prints/mtlw-1xx-xx-xx-x-xxx-xx-xx-mkt1.pdf, ComponentLink1URL=http://suddendocs.samtec.com/prints/mtlw-1xx-xx-xx-x-xxx-xx-xx-mkt1.pdf, Connector Type=Header, Contact Finish - Mating=Gold, Contact Finish - Post=Gold, Contact Finish Thickness - Mating="10µin (0.25µm)", Contact Finish Thickness - Post="3µin (0.08µm)", Contact Length - Mating="0.170\" (4.32mm)", Contact Length - Post="0.105\" (2.67mm)", Contact Material="Phosphor Bronze", Contact Shape=Square, Contact Type="Male Pin", Fastening Type=Push-Pull, Features=-, Ingress Protection=-, Insulation Height="0.060\" (1.52mm)", Insulation Material="Liquid Crystal Polymer (LCP)", Mated Stacking Heights=-, Mounting Type="Through Hole", Number of Positions=10, Number of Positions Loaded=All, Number of Rows=2, Overall Contact Length="0.335\" (8.51mm)", Packaging=Tube, Part Status=Active, Pitch - Mating="0.100\" (2.54mm)", Pricing 1="1=1.79 (USD)", RoHS="RoHS Compliant", Row Spacing - Mating="0.100\" (2.54mm)", Shrouding=Unshrouded, Stock 1=0, Style="Board to Board or Cable", Supplier 1=Digi-Key, Termination=Solder
R1 R4 R5 R9 R10 R13 R15 R24 R25: library part CMP-1011-00651-1
R2 R20 R22: library part CMP-1011-00651-1, "RES SMD 100K OHM 1% 1/8W 0402", Case/Package=0402, Case Code (Metric)=1005, Manufacturer="Vishay Dale", Manufacturer Part Number=CRCW0402100KFKEDHP, Max Operating Temperature=155°C, Max Power Dissipation=125mW, Min Operating Temperature=-55°C, Package Quantity=10, Resistance=100KR, Supplier Part Number 1=CRCW0402100KFKEDHP/BKN, Temperature Coefficient=100ppm/°C, Tolerance=1%, Voltage Rating=50V, Case Code (Imperial)=0402, ComponentLink1Description=https://datasheet.ciiva.com/8982/crcwhpe3-8982553.pdf, ComponentLink1URL=https://datasheet.ciiva.com/8982/crcwhpe3-8982553.pdf, ComponentLink2Description=https://datasheet.ciiva.com/2498/crcwhpe3-2498716.pdf, ComponentLink2URL=https://datasheet.ciiva.com/2498/crcwhpe3-2498716.pdf, ComponentLink3Description=https://datasheet.ciiva.com/2498/crcwhpe3-2498717.pdf, ComponentLink3URL=https://datasheet.ciiva.com/2498/crcwhpe3-2498717.pdf, ComponentLink4Description=https://datasheet.ciiva.com/5548/crcwhpe3-46056-5548557.pdf, ComponentLink4URL=https://datasheet.ciiva.com/5548/crcwhpe3-46056-5548557.pdf, ComponentLink5Description=https://datasheet.ciiva.com/2498/crcwhpe3-2498718.pdf, ComponentLink5URL=https://datasheet.ciiva.com/2498/crcwhpe3-2498718.pdf, ComponentLink6Description=https://datasheet.ciiva.com/48525/crcwhpe3-48525582.pdf, ComponentLink6URL=https://datasheet.ciiva.com/48525/crcwhpe3-48525582.pdf, ComponentLink7Description=https://datasheet.ciiva.com/46441/1703058-46441599.pdf, ComponentLink7URL=https://datasheet.ciiva.com/46441/1703058-46441599.pdf, Composition="Thick Film", Contact Plating=Tin, Depth=0.5mm, Height=0.3mm, Lead Free="Lead Free", Length=1mm, Mount="Surface Mount", Number of Terminations=2, Packaging="Tape and Reel", Power Rating=125mW, Pricing 1="1=0.0997, 100=0.0517, 250=0.0516, 500=0.042, 1250=0.0227 (USD)", Radiation Hardening=No, REACH SVHC=Unknown, Stock 1=0, Supplier 1=Avnet, Termination=SMD/SMT, Voltage Rating (DC)=50V, Weight=2.3E-05oz, Width=0.02inch
R3: library part CMP-1011-00651-1, "18K2 0.063W 1% 0402 (1005 Metric)  SMD", Manufacturer=VISHAY, Manufacturer Part Number=CRCW040218K2FKED, Power Rating=63, Resistance=18.2, Resistance Tolerance=1%, Resistor Case Style="0402 [1005 Metric]", Supplier Part Number 1=52K6758, Voltage Rating=50, ComponentLink1Description=http://www.vishay.com/docs/31543/packsmre.pdf, ComponentLink1URL=http://www.vishay.com/docs/31543/packsmre.pdf, ComponentLink2Description=http://www.farnell.com/cad/1551401.zip, ComponentLink2URL=http://www.farnell.com/cad/1551401.zip, ComponentLink3Description=http://www.farnell.com/datasheets/2111203.pdf?_ga=1.39057253.733356815.1493180800, ComponentLink3URL=http://www.farnell.com/datasheets/2111203.pdf?_ga=1.39057253.733356815.1493180800, No. of Pins=2, Packaging="Cut Tape", Pricing 1="1=0.004, 25=0.004, 100=0.004, 250=0.004, 500=0.004, 1000=0.004 (USD)", Product Range="CRCW Series", RoHS=YESX, Stock 1=9263, Supplier 1=Newark
R6: library part CMP-1013-00393-1
R7 R8 R12 R14 R16 R17: library part CMP-1011-00463-1
R11: library part Trimmer, Manufacturer="Vishay Foil Resistors (Division of Vishay Precision Group)", Manufacturer Part Number=Y00535K00000J0L, Power (Watts)="0.25W, 1/4W", Resistance (Ohms)=5k, Resistive Material="Metal Foil", Supplier Part Number 1=804-1020-ND, Temperature Coefficient=±10ppm/°C, Tolerance=±5%, Adjustment Type="Side Adjustment", Category="Potentiometers, Variable Resistors", ComponentLink1Description=http://www.vishaypg.com/docs/63053/1240.pdf, ComponentLink1URL=http://www.vishaypg.com/docs/63053/1240.pdf, Mounting Type="Through Hole", Number of Turns=21, Packaging=Bulk, Part Status=Active, Pricing 1="1=34.42, 10=32.265, 25=26.5292, 50=22.944, 100=22.227, 250=20.793, 500=19.2156 (USD)", RoHS="RoHS Compliant", Size / Dimension="Rectangular - 0.250\" x 0.175\" Face x 0.250\" L (6.35mm x 4.45mm x 6.35mm)", Stock 1=679, Supplier 1=Digi-Key, Termination Style="PC Pins"
R18 R19 R21 R23 R26 R27 R28 R29 R30 R31 R32 R33 R34 R35 R36 R37: library part CMP-1011-00651-1, "RES SMD 10K OHM 1% 1/8W 0402", Case/Package=0402, Case Code (Metric)=1005, Manufacturer="Vishay Dale", Manufacturer Part Number=CRCW0402100KFKEDHP, Supplier Part Number 1=CRCW0402100KFKEDHP/BKN, Case Code (Imperial)=0402, ComponentLink1Description=https://datasheet.ciiva.com/8982/crcwhpe3-8982553.pdf, ComponentLink1URL=https://datasheet.ciiva.com/8982/crcwhpe3-8982553.pdf, ComponentLink2Description=https://datasheet.ciiva.com/2498/crcwhpe3-2498716.pdf, ComponentLink2URL=https://datasheet.ciiva.com/2498/crcwhpe3-2498716.pdf, ComponentLink3Description=https://datasheet.ciiva.com/2498/crcwhpe3-2498717.pdf, ComponentLink3URL=https://datasheet.ciiva.com/2498/crcwhpe3-2498717.pdf, ComponentLink4Description=https://datasheet.ciiva.com/5548/crcwhpe3-46056-5548557.pdf, ComponentLink4URL=https://datasheet.ciiva.com/5548/crcwhpe3-46056-5548557.pdf, ComponentLink5Description=https://datasheet.ciiva.com/2498/crcwhpe3-2498718.pdf, ComponentLink5URL=https://datasheet.ciiva.com/2498/crcwhpe3-2498718.pdf, ComponentLink6Description=https://datasheet.ciiva.com/48525/crcwhpe3-48525582.pdf, ComponentLink6URL=https://datasheet.ciiva.com/48525/crcwhpe3-48525582.pdf, ComponentLink7Description=https://datasheet.ciiva.com/46441/1703058-46441599.pdf, ComponentLink7URL=https://datasheet.ciiva.com/46441/1703058-46441599.pdf, Composition="Thick Film", Contact Plating=Tin, Depth=0.5mm, Height=0.3mm, Lead Free="Lead Free", Length=1mm
U1 U6 U8 U11: library part CMP-0809-00005-2, "Precision, Low Noise, Rail-to-Rail Output, Zero-Drift Operational Amplifier, 4 to 36 V, -40 to 125 degC, 5-pin SOT23 (DBV5), Green (RoHS & no Sb/Br)", Manufacturer="Texas Instruments", Rating=Catalog, Total Supply Voltage(Max)(+5V is 5, +/-5V is 10)=36, Total Supply Voltage(Min)(+5V is 5, +/-5V is 10)=4, CMRR(Min)(dB)=120, Code_JEDEC=MO-178, ComponentLink1Description="Manufacturer URL", ComponentLink1URL=http://www.ti.com/, ComponentLink2Description=Datasheet, ComponentLink2URL=http://www.ti.com/lit/ds/symlink/opa188.pdf, ComponentLink3Description="Package Specification", ComponentLink3URL=http://www.ti.com/litv/pdf/mpds018i, DatasheetVersion=SBOS642A, Eco-Plan="Green (RoHS & no Sb/Br)", GBW(Typ)(MHz)=2, Iq per channel(Max)(mA)=0.51, Mounting Technology="Surface Mount", Number of Channels=1, Offset Drift(Typ)(uV/C)=0.03, PackageDescription="5-Pin Plastic Small Outline, Body 1.6 x 2.9 mm, Pitch 0.95 mm", PackageReference=DBV0005A, PackageVersion="4073253-4/K, 03/2006", PartNumber=OPA188AIDBVR, Slew Rate(Typ)(V/us)=0.8, SubFamily="Zero Drift Precision Amplifier"
U2: library part CMP-0784-00054-1, "Pin Programmable, Precision Voltage Reference, + 2.5 / + 5 / + 7.5 / + 10 Prog V Output, 4.5 to 30 V Supply, Commercial, 8-pin DIP (N-8), Tube", Manufacturer="Analog Devices", Operating Temp Range="0 to 70 degC", Code_JEDEC=MS-001, ComponentLink1Description="Manufacturer URL", ComponentLink1URL=http://www.analog.com/en/index.html, ComponentLink2Description=Datasheet, ComponentLink2URL=http://www.analog.com/static/imported-files/data_sheets/AD584.pdf, ComponentLink3Description="Package Specification", ComponentLink3URL=http:/www.analog.com/static/imported-files/packages/PKG_PDF/PDIP(N)/N_8.pdf, ComponentLink4Description="URL Link1", ComponentLink4URL="Product URL:http://www.analog.com/en/special-linear-functions/voltage-references/ad584/products/product.html", DatasheetVersion="Rev. C", Max V Supply (V)=30, Min V Supply (V)=4.5, Mounting Technology="Through Hole", PackageDescription="8-Pin Plastic Dual In-Line Package, Row spacing 7.62 mm, Pitch 2.54 mm", PackageReference=N-8, PackageVersion="070606-A, 07/2006", Packing=Tube, PartNumber=AD584KNZ, Ref Out TC (ppm/C)=15, Vout="2.5V, 5V, 7.5V, 10V"
U3 U12 U14: "IC SWITCH QUAD SPDT 20TSSOP", Case/Package=TSSOP, Dual Supply Voltage=15V, Manufacturer=Maxim, Manufacturer Part Number=MAX333AEUP+, Max Dual Supply Voltage=20V, Max Operating Temperature=85°C, Max Power Dissipation=559mW, Max Supply Current=250uA, Max Supply Voltage=30V, Min Dual Supply Voltage=4.5V, Min Operating Temperature=-40°C, Min Supply Voltage=10V, On-State Resistance=35R, Operating Supply Current=1uA, Package Quantity=74, Supplier Part Number 1=700-MAX333AEUP, ComponentLink1Description=https://datasheet.ciiva.com/2978/max333a-2978850.pdf, ComponentLink1URL=https://datasheet.ciiva.com/2978/max333a-2978850.pdf, ComponentLink2Description=https://datasheet.ciiva.com/30478/0900766b81253c85-30478260.pdf, ComponentLink2URL=https://datasheet.ciiva.com/30478/0900766b81253c85-30478260.pdf, ComponentLink3Description=https://datasheet.ciiva.com/1674/max333a-1674617.pdf, ComponentLink3URL=https://datasheet.ciiva.com/1674/max333a-1674617.pdf, ComponentLink4Description=https://datasheet.ciiva.com/26825/max333aeup-26825546.pdf, ComponentLink4URL=https://datasheet.ciiva.com/26825/max333aeup-26825546.pdf, Height=0.95mm, Lead Free="Lead Free", Length=6.6mm, Number of Bits=4, Number of Channels=4, Number of Pins=20, Packaging=Rail/Tube, Pricing 1="1=6.77, 10=6.43, 50=5.8, 100=5.8, 1000=5.62, 10000=5.62 (USD)", Radiation Hardening=No, REACH SVHC=Unknown, Stock 1=664, Supplier 1=Mouser, Supply Type=Single,Dual, Throw Configuration=SPDT, Turn-Off Delay Time=145ns, Turn-On Delay Time=175ns, Weight=0.006737oz, Width=4.5mm
U4 U13 U15: library part CMP-0272-00241-3, "0.03 uV/degC, 6 uV Vos, Low Noise, Rail-to-Rail Output, Zero-Drift Operational Amplifier, 4 to 36 V, -40 to 105 degC, 8-pin SOIC (D8), Green (RoHS & no Sb/Br)", Current - Output / Channel=18mA, Current - Supply=415µA, Manufacturer="Texas Instruments", Operating Temperature="-40°C ~ 105°C", Package / Case="8-SOIC (0.154\", 3.90mm Width)", Supplier Device Package=8-SOIC, Supplier Part Number 1=296-29454-6-ND, Voltage - Supply, Single/Dual (±)="4 V ~ 36 V, ±2 V ~ 18 V", -3db Bandwidth=-, Amplifier Type=Zero-Drift, Category="Integrated Circuits (ICs)", ComponentLink1Description=http://www.ti.com/lit/ds/symlink/opa2188.pdf, ComponentLink1URL=http://www.ti.com/lit/ds/symlink/opa2188.pdf, Manufacturer Part Number=OPA2188AIDR, Mounting Type="Surface Mount", Number of Circuits=2, Output Type=Rail-to-Rail, Packaging=Digi-Reel®, Part Status=Active, Pricing 1="1=3.44, 10=3.089, 100=2.5307, 500=2.15434, 1000=1.81692 (USD)", RoHS="RoHS Compliant", Slew Rate="0.8 V/µs", Stock 1=8272, Supplier 1=Digi-Key
U5: Current - Supply=7.5mA, Manufacturer="Linear Technology", Operating Temperature="-40°C ~ 125°C (TA)", Package / Case="8-TSSOP, 8-MSOP (0.118\", 3.00mm Width)", Supplier Device Package=8-MSOP, Supplier Part Number 1=LTC6655BHMS8-5#PBF-ND, Temperature Coefficient=2ppm/°C, Tolerance=±0.025%, Voltage - Input="5.5 V ~ 13.2 V", Voltage - Output (Min/Fixed)=5V, Category="Integrated Circuits (ICs)", ComponentLink1Description=http://www.linear.com/docs/28576, ComponentLink1URL=http://www.linear.com/docs/28576, Manufacturer Part Number=LTC6655BHMS8-5#PBF, Mounting Type="Surface Mount", Noise - 0.1Hz to 10Hz=0.25ppmp-p, Noise - 10Hz to 10kHz=-, Output Type=Fixed, Packaging=Tube, Part Status=Active, Pricing 1="1=12.29, 25=8.158, 100=6.7 (USD)", Reference Type=Series, RoHS="RoHS Compliant", Stock 1=872, Supplier 1=Digi-Key
U7: "IC VREF SERIES 4.096V SOT23", Current - Supply=350µA, Manufacturer="Maxim Integrated", Operating Temperature="-40°C ~ 125°C (TA)", Package / Case=SOT-23-6, Supplier Part Number 1=MAX6070AAUT41+TCT-ND, Temperature Coefficient=6ppm/°C, Tolerance=±0.04%, Voltage - Input="4.3 V ~ 5.5 V", Voltage - Output (Min/Fixed)=4.096V, Category="Integrated Circuits (ICs)", ComponentLink1Description=https://datasheets.maximintegrated.com/en/ds/MAX6070-MAX6071.pdf, ComponentLink1URL=https://datasheets.maximintegrated.com/en/ds/MAX6070-MAX6071.pdf, Manufacturer Part Number=MAX6070AAUT41+T, Mounting Type="Surface Mount", Noise - 0.1Hz to 10Hz=9.6µVp-p, Noise - 10Hz to 10kHz=9µVrms, Output Type=Fixed, Packaging="Cut Tape (CT)", Part Status=Active, Pricing 1="1=3.41, 10=3.213, 25=2.5704, 50=2.4418, 100=2.2491, 250=2.13344, 500=2.05634 (USD)", Reference Type=Series, RoHS="RoHS Compliant", Stock 1=2623, Supplier 1=Digi-Key, Supplier Device Package=SOT-23-6
U9: library part CMP-0793-00109-1, "Low Capacitance, Low Charge Injection, +/-15 V / +12 V, 4:1 iCMOS Multiplexer, 120 Ohm Ron, 14-pin SOP (RU-14), Reel", Manufacturer="Analog Devices", Bandwidth (Hz)="800M, 550M", Code_JEDEC=MO-153AB-1, ComponentLink1Description="Manufacturer URL", ComponentLink1URL=http://www.analog.com/en/index.html, ComponentLink2Description=Datasheet, ComponentLink2URL=http://www.analog.com/static/imported-files/data_sheets/ADG1204.pdf, ComponentLink3Description="Package Specification", ComponentLink3URL=http://www.analog.com/static/imported-files/packages/36057385283879153717235186773RU14.pdf, DatasheetVersion="Rev. B", Max Analog Signal Range="Vss to Vdd", Mounting Technology="Surface Mount", PackageDescription="14-Pin Thin Shrink Small Outline Package, Body 5 x 4.4 mm, Pitch 0.65 mm", PackageReference=RU-14, PackageVersion=Aug-02, Packing=Reel, PartNumber=ADG1204YRUZ-REEL7, Ron (ohms)=120, t transition (s)=120n
U10: library part CMP-0249-00017-1, "16-Bit, +5V, 200ksps ADC with 10uA Shutdown, 10-Pin uMAX, -40°C to +85°C, Pb-Free, Tape and Reel", Code_JEDEC=MO-187-BA, ComponentLink1Description="Manufacturer URL", ComponentLink1URL=http://www.maxim-ic.com, ComponentLink2Description=Datasheet, ComponentLink2URL=http://datasheets.maxim-ic.com/en/ds/MAX11100.pdf, ComponentLink3Description="Package Specification", ComponentLink3URL=http://pdfserv.maxim-ic.com/package_dwgs/21-0061.PDF, DatasheetVersion="Rev 1, Jan-2012", PackageDescription="10-Pin Micro-MAX Thin Shrink Small Outline (uSOP), 3 x 3 x 0.85 mm Body, 0.5 mm Pitch, Pb-Free", PackageReference=U10+2, PackageVersion="revL, 2008"

## Free pads (board coordinates)
  round 5 hole 3: ""(0,0) ""(0,59.69) ""(59.69,0) ""(59.69,59.69)

## Via types
v1: diameter 1, hole 0.5, Top Layer to Bottom Layer, 20 vias
v2: diameter 1.27, hole 0.711, Top Layer to Bottom Layer, 6 vias

## Nets (pads, with @x,y where several pads share a name; then routed paths per layer and width w, separated by ;. In a path a pad name is that pad's centre, name@x,y a point inside that pad or via, vN(x,y) a via of type N, cw(c..) or ccw(c..) an arc to the next point about the centre after c; other vN are vias at no path point)
+3.3: C20.1 P7.6 U10.3 | length 2.5
  Top Layer w0.254: U10.3 44.711,18.693 46.235,18.693 46.346,18.804 46.354,18.796 v1(47.123,18.796)
+5: C2.1 C14.2 C18.2 C19.1 C21.2 P5.4 P6.6 P7.4 R2.2 U1.5 U5.1 U5.2 U7.3 U7.4 U8.5 U9.2 U9.12 U10.7 U11.5 | length 28.3
  Top Layer w0.254: v1(14.605,62.357) 14.592,62.344 14.592,61.068 C14.2 U5.2 U5.1 ; v1(26.067,26.478) 26.21,26.336 26.21,25.82 26.729,25.301 R2.2 ; v1(27.134,30.466) 27.137,30.463 28.171,30.463 U1.5@28.369,30.265 ; C2.1 28.345,31.713 U1.5@28.345,30.289 ; U7.3 U7.4 37.421,17.472 39.146,19.197 41.731,19.197 v1@42.481,19.947 ; C21.2@38.097,28.367 38.164,28.301 39.644,28.301 U11.5 39.723,28.39 39.723,29.84 v1(39.718,29.845) ; U8.5@45.091,28.326 45.079,28.339 45.079,29.819 v1(45.091,29.831) 45.293,29.831 45.555,30.093 45.955,30.093 C18.2 ; v1@47.418,22.56 48.743,22.56 U9.2 ; U9.12 54.424,21.879 55.845,21.879 v1(55.88,21.844)
  Bottom Layer w0.254: v1(42.506,19.972) 42.529,19.995 42.529,21.04 C19.1
  other v1: 47.381,22.572
+5R: U3.12 U3.17 U6.1 U6.4 | length 29.5
  Top Layer w0.254: U3.17 7.913,73.986 7.461,73.534 7.461,71.188 7.913,70.736 8.963,70.736 9.525,70.174 v1(9.525,68.199) 14.59,63.134 23.209,63.134 23.539,62.804 24.314,62.804 26.016,61.102 U6.4 26.349,61.044 28.034,61.044 v1(28.092,60.985)
+9: C8.2 C23.2 P6.10 U3.16 U12.16 | length 79.1
  Top Layer w0.254: v2(-2.568,69.415) -2.797,69.187 -2.797,39.697 -2.226,39.127 1.513,39.127 P6.10 ; U3.16 v2(11.148,73.336) ; U12.16 19.622,31.059 19.047,31.634 v2(19.047,36.611) 20.655,36.611 C23.2
  Bottom Layer w0.254: v2(-2.568,69.415) 1.47,73.454 C8.2 11.03,73.454 v2(11.148,73.336) ; P6.10 4.029,36.611 v2(19.047,36.611)
+12: C12.2 C13.2 P6.5 U4.8 U6.5 | length 49.8
  Top Layer w0.254: U4.8 26.165,69.215 v1(27.432,69.215) ; C13.2 26.283,63.01 26.321,62.972 28.24,62.972 v1(28.27,62.941)
  Bottom Layer w0.254: P6.5 1.513,44.693 10.022,44.693 v1(28.27,62.941) 27.432,63.779 v1(27.432,69.215) 27.412,69.195 C12.2@26.047,69.195 ; C12.2@25.894,68.947 25.894,69.043 C12.2@26.047,69.195
-5: C3.1 C9.1 C22.1 P5.3 P6.7 U1.2 U3.5 U12.5 | length 134.8
  Top Layer w0.254: U3.5 1.708,73.336 1.143,72.771 1.143,68.453 2.54,67.056 v1(3.048,67.056) ; C22.1 11.856,31.059 13.586,31.059 ; v2(13.256,38.402) 13.256,31.389 13.586,31.059 ; U12.5 13.586,31.059 ; C3.1 29.382,25.469 29.382,27.023 U1.2 29.319,27.361 29.667,27.709 29.667,27.772 29.857,27.963 33.612,27.963 C9.1 33.909,28.325 v2(33.909,30.353) ; v1(31.914,76.324) 33.721,76.324 35.126,74.919 35.179,74.867 P5.3
  Bottom Layer w0.254: v1(31.914,76.324) 27.309,76.324 18.041,67.056 v1(3.048,67.056) 3.048,55.324 -1.027,51.249 -1.027,41.667 1.141,39.499 12.159,39.499 v2(13.256,38.402) 27.51,38.402 33.909,32.003 v2(33.909,30.353)
"ADC REF": C17.2 U7.5 U7.6 U10.6 | length 5.9
  Top Layer w0.254: U7.5 U7.6 ; 36.226,18.407 37.5,18.407 38.788,19.695 U10.6
Analog_Mux_Out: U9.6 U10.5 | length 4.2
  Top Layer w0.254: U10.5 48.028,19.695 48.28,19.947 U9.6
BEAM: P5.1 U12.14 | length 52.6
  Top Layer w0.254: U12.14 19.622,29.759 17.272,32.109 17.272,37.846 37.284,57.858 37.284,68.603 37.284,71.428 P5.1
"Beam Sync Demod Out": C4.2 P2.2 R2.1 R4.2 R18.2 | length 12.6
  Top Layer w0.254: C4.2 25.561,24.149 26.727,24.149 R2.1 28.353,24.201 29.479,23.075 29.812,23.075 30.74,22.147 ; P2.2 30.617,21.436 30.617,22.024 30.74,22.147 ; R18.2 36.039,22.147 30.74,22.147
Beam_mod: R3.1 U12.13 | length 2.3
  Top Layer w0.254: U12.13 20.16,29.096 22.424,29.096 R3.1
Beam_Reduced: R18.1 R19.2 U9.5 | length 15
  Top Layer w0.254: R19.2 R18.1 40.859,23.283 43.545,20.597 U9.5
GND: C2.2 C3.2 C4.1 C6.1 C7.2 C8.1 C9.2 C12.1 C13.1 C14.1 C15.1 C16.2 C17.1 C18.1 C19.2 C20.2 C21.1 C22.2 C23.1 C24.1 C25.1 C28.1 P1.1 P2.1 P3.1 P4.2 P5.2 P5.9 P6.9 P7.1 R5.1 R6.2 R11.2 R16.1 R17.1 R19.1 R21.1 R23.1 R28.1 R31.2 R34.2 R35.2 R36.2 U2.4 U3.2 U3.6 U3.14 U3.19 U4.4 U5.3 U5.4 U5.5 U5.8 U6.2 U7.2 U8.2 U9.3 U9.13 U10.2 U10.4 U10.8 U11.2 U12.12 U13.4 U14.1 U14.2 U14.3 U14.4 U14.5 U14.6 U14.7 U14.8 U14.9 U14.10 U14.14 U14.19 U15.4 | length 19.6
  Top Layer w0.254: U10.8 42.705,18.695 ; U10.4 43.205,19.195 42.705,18.695 ; C20.2@46.107,17.888 46.044,17.952 45.8,18.195 U10.2 43.205,18.195 42.705,18.695 ; U14.14 112.608,70.018 112.903,69.723 U13.4
  other v2: 16.332,73
NetC1_1: C1.1 P1.2 R1.1 R3.2 U1.4 | length 12.8
  Top Layer w0.254: R3.2 23.551,29.097 24.987,29.097 R1.1 25.076,29.036 26.45,29.036 C1.1 29.469,28.961 30.269,29.761 30.269,34.059 29.378,34.95 P1.2@29.319,34.95
NetC1_2: C1.2 R1.2 R4.1 U1.1 | length 5.8
  Top Layer w0.254: R1.2 25.076,28.086 26.45,28.086 C1.2 27.569,28.161 28.336,27.394 28.336,25.334 R4.1
NetC5_1: C5.1 U2.7 | length 1.8
  Bottom Layer w0.254: U2.7 43.105,48.069 43.53,48.069 C5.1
NetC5_2: C5.2 U2.6 | length 1.7
  Bottom Layer w0.254: U2.6 42.595,49.77 43.23,49.135 43.53,49.135 C5.2
NetC10_1: C10.1 R9.2 R10.2 R17.2 | length 5.7
  Top Layer w0.254: C10.1 C10.1@14.834,74.751 ; R17.2 C10.1@14.834,74.751 ; R10.2 R9.2 14.872,74.789 C10.1@14.834,74.751
NetC10_2: C10.2 R7.1 R8.2 | length 2.7
  Top Layer w0.254: R8.2 R7.1 C10.2
NetC11_1: C11.1 R13.2 R15.2 R16.2 | length 5.7
  Top Layer w0.254: C11.1 14.834,71.322 R16.2 14.877,69.921 17.671,69.921 R15.2 R13.2
NetC11_2: C11.2 R12.1 R14.2 | length 2.8
  Top Layer w0.254: R12.1 R14.2 C11.2
NetC15_2: C15.2 U5.6 U5.7 U6.3 | length 9
  Top Layer w0.254: U5.6 22.423,60.406 22.868,60.852 22.868,60.904 U6.3@23.02,61.056 ; U5.7 20.437,61.079 U6.3@23.272,61.079 ; U6.3 23.341,59.138 23.734,58.744 C15.2@24.46,58.744
NetC16_1: C16.1 U7.1 | length 1.4
  Top Layer w0.254: 33.476,19.357 33.842,19.723 C16.1
NetC26_1: C26.1 R33.1 U15.6 U15.7
NetC26_2: C26.2 R34.1 U15.3
NetC27_1: C27.1 R36.1
NetC27_2: C27.2 R37.1 U15.1
NetP3_2: P3.2 R6.1 U2.3 | length 29.2
  Top Layer w0.254: P3.2 43.18,74.992 48.449,69.723 48.449,57.758 R6.1 48.469,51.187 U2.3
NetP7_3: P7.3 U9.14 | length 10.5
  Top Layer w0.254: U9.14 55.924,23.197 56.913,22.208 56.913,16.747 P7.3
NetP7_5: P7.5 U9.1 | length 14.8
  Top Layer w0.254: U9.1 49.32,23.197 50.419,22.098 50.419,20.701 P7.5
NetP7_7: P7.7 U10.1 | length 17
  Top Layer w0.254: U10.1 44.958,17.695 44.958,17.653 46.482,16.129 52.578,10.033 58.293,10.033 P7.7
NetP7_9: P7.9 U10.10 | length 21.9
  Top Layer w0.254: U10.10 42.827,17.695 52.903,7.62 P7.9
NetP7_10: P7.10 U10.9 | length 31.2
  Top Layer w0.254: U10.9 39.277,18.195 38.862,17.78 38.862,17.145 50.673,5.334 58.674,5.334 P7.10@61.417,8.077
NetR5_2: R5.2 U1.3 | length 1.9
  Top Layer w0.254: U1.3 30.429,26.926 30.429,25.461 R5.2
NetR7_2: R7.2 U3.18 | length 2.2
  Top Layer w0.254: U3.18 8.451,74.649 10.588,74.649 R7.2
NetR8_1: R8.1 R11.1 | length 18.6
  Top Layer w0.254: R8.1 10.601,75.982 11.223,76.604 v1(13.231,76.604)
  Bottom Layer w0.254: v1(13.231,76.604) 13.231,80.964 19.812,87.545 20.066,87.799 R11.1
NetR9_1: R9.1 R13.1 U4.5 | length 13.1
  Top Layer w0.254: v1(18.78,72.441) 18.796,72.458 18.796,74.772 R9.1 ; R13.1 18.865,68.745 22.179,68.745 22.327,68.893 U4.5 ; v1(22.346,72.46) 22.337,72.451 22.337,69.259 U4.5@22.352,69.243
  Bottom Layer w0.254: v1(18.78,72.441) 18.789,72.45 22.336,72.45 v1(22.346,72.46)
NetR10_1: R10.1 R15.1 U4.3 | length 12.3
  Top Layer w0.254: R15.1 18.813,70.013 20.168,71.368 20.168,76.059 ; R10.1 20.168,76.059 ; U4.3 23.597,74.843 22.381,76.059 20.168,76.059
NetR11_3: R11.3 R12.2 | length 29
  Top Layer w0.254: R12.2 10.601,70.04 12.061,68.58 v1(13.081,68.58)
  Bottom Layer w0.254: v1(13.081,68.58) 15.113,70.612 15.113,79.375 22.85,87.112 R11.3
NetR14_1: R14.1 U3.13 | length 2.2
  Top Layer w0.254: U3.13 8.451,71.373 10.588,71.373 R14.1
NetR20_1: R20.1 R21.2 U8.3 | length 20.4
  Top Layer w0.254: U8.3 50.541,25.395 50.927,25.781 50.927,28.321 ; 50.927,28.575 50.927,28.321 ; R21.2 52.197,39.252 ; R20.1 52.197,39.252 ; 50.927,28.321 50.927,38.472 51.707,39.252 52.197,39.252
NetR22_1: R22.1 R23.2 U11.3 | length 16.6
  Top Layer w0.254: U11.3 41.628,25.71 43.586,27.668 43.586,37.201 45.543,39.158 R23.2 R22.1
NetR26_1: R26.1
NetR26_2: R26.2 U13.7
NetR27_1: R27.1
NetR27_2: R27.2 U13.6
NetR29_1: R29.1
NetR29_2: R29.2 U13.1
NetR30_1: R30.1
NetR30_2: R30.2 U13.2
NetR31_1: R31.1 R32.1 U15.5
NetR32_2: R32.2
NetR33_2: R33.2
NetR35_1: R35.1 R37.2 U15.2
NetU13_3: U13.3 U14.13 | length 9.6
  Top Layer w0.254: U14.13 111.353,69.368 111.633,69.088 U13.3
NetU13_5: U13.5 U14.18 | length 11.3
  Top Layer w0.254: U14.18 106.579,72.618 106.934,72.263 112.395,72.263 112.903,72.771 U13.5
PLATE_N: P5.6 U4.6 U4.7 | length 13.8
  Top Layer w0.254: U4.6 U4.7
  Top Layer w0.381: U4.7 24.88,69.231 24.88,67.576 24.892,67.564 31.115,67.564 33.909,70.358 P5.6
PLATE_P: P5.5 U4.1 U4.2 | length 13.5
  Top Layer w0.254: U4.2 U4.1
  Top Layer w0.381: U4.2 24.88,74.506 24.88,76.061 24.892,76.073 30.099,76.073 P5.5
PWM1A: P5.10 P7.2 | length 68.9
  Bottom Layer w0.254: P5.10 31.369,42.291 41.537,32.123 47.379,32.123 54.05,25.452 54.05,24.773 60.96,17.863 P7.2
PWM2A: P6.2 R24.1 | length 32.8
  Top Layer w0.254: P6.2 9.086,41.714 9.086,30.411 14.097,25.4 R24.1
PWM2B: P6.8 R25.1 U3.11 U3.20 | length 68.6
  Top Layer w0.254: U3.11 7.913,70.086 7.057,70.942 ; U3.20 7.913,75.936 7.057,75.08 7.057,70.942 ; R25.1 12.319,23.622 6.477,29.464 6.477,36.703 1.513,41.667 1.513,49.138 7.057,54.682 7.057,70.942
Sync_clk: R24.2 R25.2 U12.11 | length 4.4
  Top Layer w0.254: U12.11 20.318,27.809 20.362,27.765 R25.2
ZH: C6.2 P4.1 P5.8 P7.8 R20.2 U2.1 U14.12 U14.17 | length 101.6
  Top Layer w0.254: R20.2 v1(52.197,42.672)
  Bottom Layer w0.254: P5.8 32.639,68.834 34.036,67.437 53.5,67.437 ; C6.2 49.854,44.722 U2.1 50.509,44.067 50.802,44.067 v1@51.96,42.909 ; v1(52.197,42.672) 52.391,42.866 53.5,43.975 P4.1 ; 53.5,44.45 55.278,42.672 61.987,35.963 61.987,11.187 P7.8
ZH_Reduced: U9.4 U11.1 U11.4 | length 14.7
  Top Layer w0.254: U11.4 41.628,28.11 39.926,26.408 39.926,25.633 U11.1 39.728,25.16 40.076,24.812 40.076,24.749 43.578,21.247 U9.4
ZP: C7.1 C24.2 C25.2 C28.2 P4.3 P5.7 R22.2 U2.8 U13.8 U14.16 U15.8 | length 92.9
  Top Layer w0.254: U2.8 42.297,44.69 45.543,41.444 48.532,41.444 55.626,48.538 55.626,68.199 58.58,71.153 P4.3 ; U14.16 101.275,71.318 100.838,71.755 100.838,74.549 101.346,75.057 105.918,75.057 107.357,73.618 U13.8
  Bottom Layer w0.254: P5.7 32.639,75.057 34.973,77.391 57.389,77.391 P4.3 ; U2.8 43.737,44.69 44.185,45.138 C7.1
ZP_Reduced: U8.1 U8.4 U9.11 | length 15
  Top Layer w0.254: U8.4 46.967,28.071 45.265,26.368 45.265,25.593 U8.1 45.265,25.197 45.265,24.859 46.475,23.649 51.554,23.649 53.956,21.247 U9.11
pads on no net: P6.1 P6.3 P6.4 R28.2 U2.2 U2.5 U3.1 U3.3 U3.4 U3.7 U3.8 U3.9 U3.10 U3.15 U9.7 U9.8 U9.9 U9.10 U12.1 U12.2 U12.3 U12.4 U12.6 U12.7 U12.8 U12.9 U12.10 U12.15 U12.17 U12.18 U12.19 U12.20 U14.11 U14.15 U14.20

## Polygon pours and split planes (outlines as drawn)
GND on Bottom Layer "Bottom_GND" (solid, shelved, pour order 2): -3.81,94.031 -3.81,-3.81 63.187,-3.81 63.187,94.031
GND on Top Layer "Top_GND" (solid, shelved, pour order 0): -3.81,94.031 -3.81,-3.81 63.187,-3.81 63.187,94.031
+5 on +5V (split plane): 62.677,93.52 62.677,-3.302 -3.302,-3.302 -3.302,93.52
+3.3 on GND (split plane): 62.677,93.52 62.677,-3.302 -3.302,-3.302 -3.302,93.52

## Silkscreen, mask and mechanical layers (free items; w line width, h text height)
Top Overlay:
  circle w0.1: c7.1,11.69 r4.663
  circle w0.254: c7.1,11.69 r5
  rectangle: 42.164,60.198 51.181,69.088
  lines w0.127: 5.576,14.052 6.338,13.29 7.1,13.798 6.084,12.528 7.608,13.29 6.592,12.02 8.116,12.782 7.1,11.512 8.624,12.274 7.608,11.004 9.132,11.766 8.624,11.004 9.386,10.242
  lines w0.254: 5.068,14.179 6.084,14.179 ; 5.576,14.052 5.576,10.242 9.386,10.242 ; 9.513,9.734 9.513,10.75 ; 10.668,72.009 10.668,72.263 11.176,72.771
  text "ZLS" at 6.084,8.642 h1.2
  text "LM-002" at 5.435,2.451 h0.75
  text "REV A" at 5.435,0.546 h0.75
  text "ZLS Corp" at 5.435,-1.359 h0.75
Bottom Overlay:
  text "Offset / Adjust" at 23.749,83.566 h0.51
  text "GND" at 56.464,74.778 h0.75 r90
  text "ZH" at 53.924,74.625 h0.75 r90
  text "ZP" at 59.03,74.6 h0.75 r90
  text "ZH Adjust Pot" at 47.523,73.076 h0.75
  text "Beam Mod Out" at 29.21,36.83 h0.51 r270
  text "Synch Demod Out" at 30.099,12.065 h0.51 r270
Mechanical 1:
  text "Top faces inward to center of meter" at -1.778,90.424 h0.51

## Dimensions
63.187,-3.813 to -3.813,-3.813 on Mechanical 1
-3.813,-3.813 to -3.813,94.031 on Mechanical 1
59.69,59.69 to 59.69,0 on Mechanical 1
59.69,0 to 0,0 on Mechanical 1
0,0 to -3.81,-3.81 on Mechanical 1
-3.813,-3.813 to 0,0 on Mechanical 1
60.96,7.62 to 59.69,0 on Mechanical 1

## Text inside footprints (layer, text, board x,y; h text height)
P5: Mechanical 1 "J1" at 34.406,72.136 h0.76 r180